# Altium PCB nfc.PcbDoc
Units mil, origin at the board's own origin, x right, y up, seen from the top; angles counter-clockwise.
Board outline 6000 x 4000 mil, 2 copper layers (Top Layer, Bottom Layer); 58 components, 64 nets, 237 pads, 16 vias.
Unrouted connection lines stored in the file: 139.
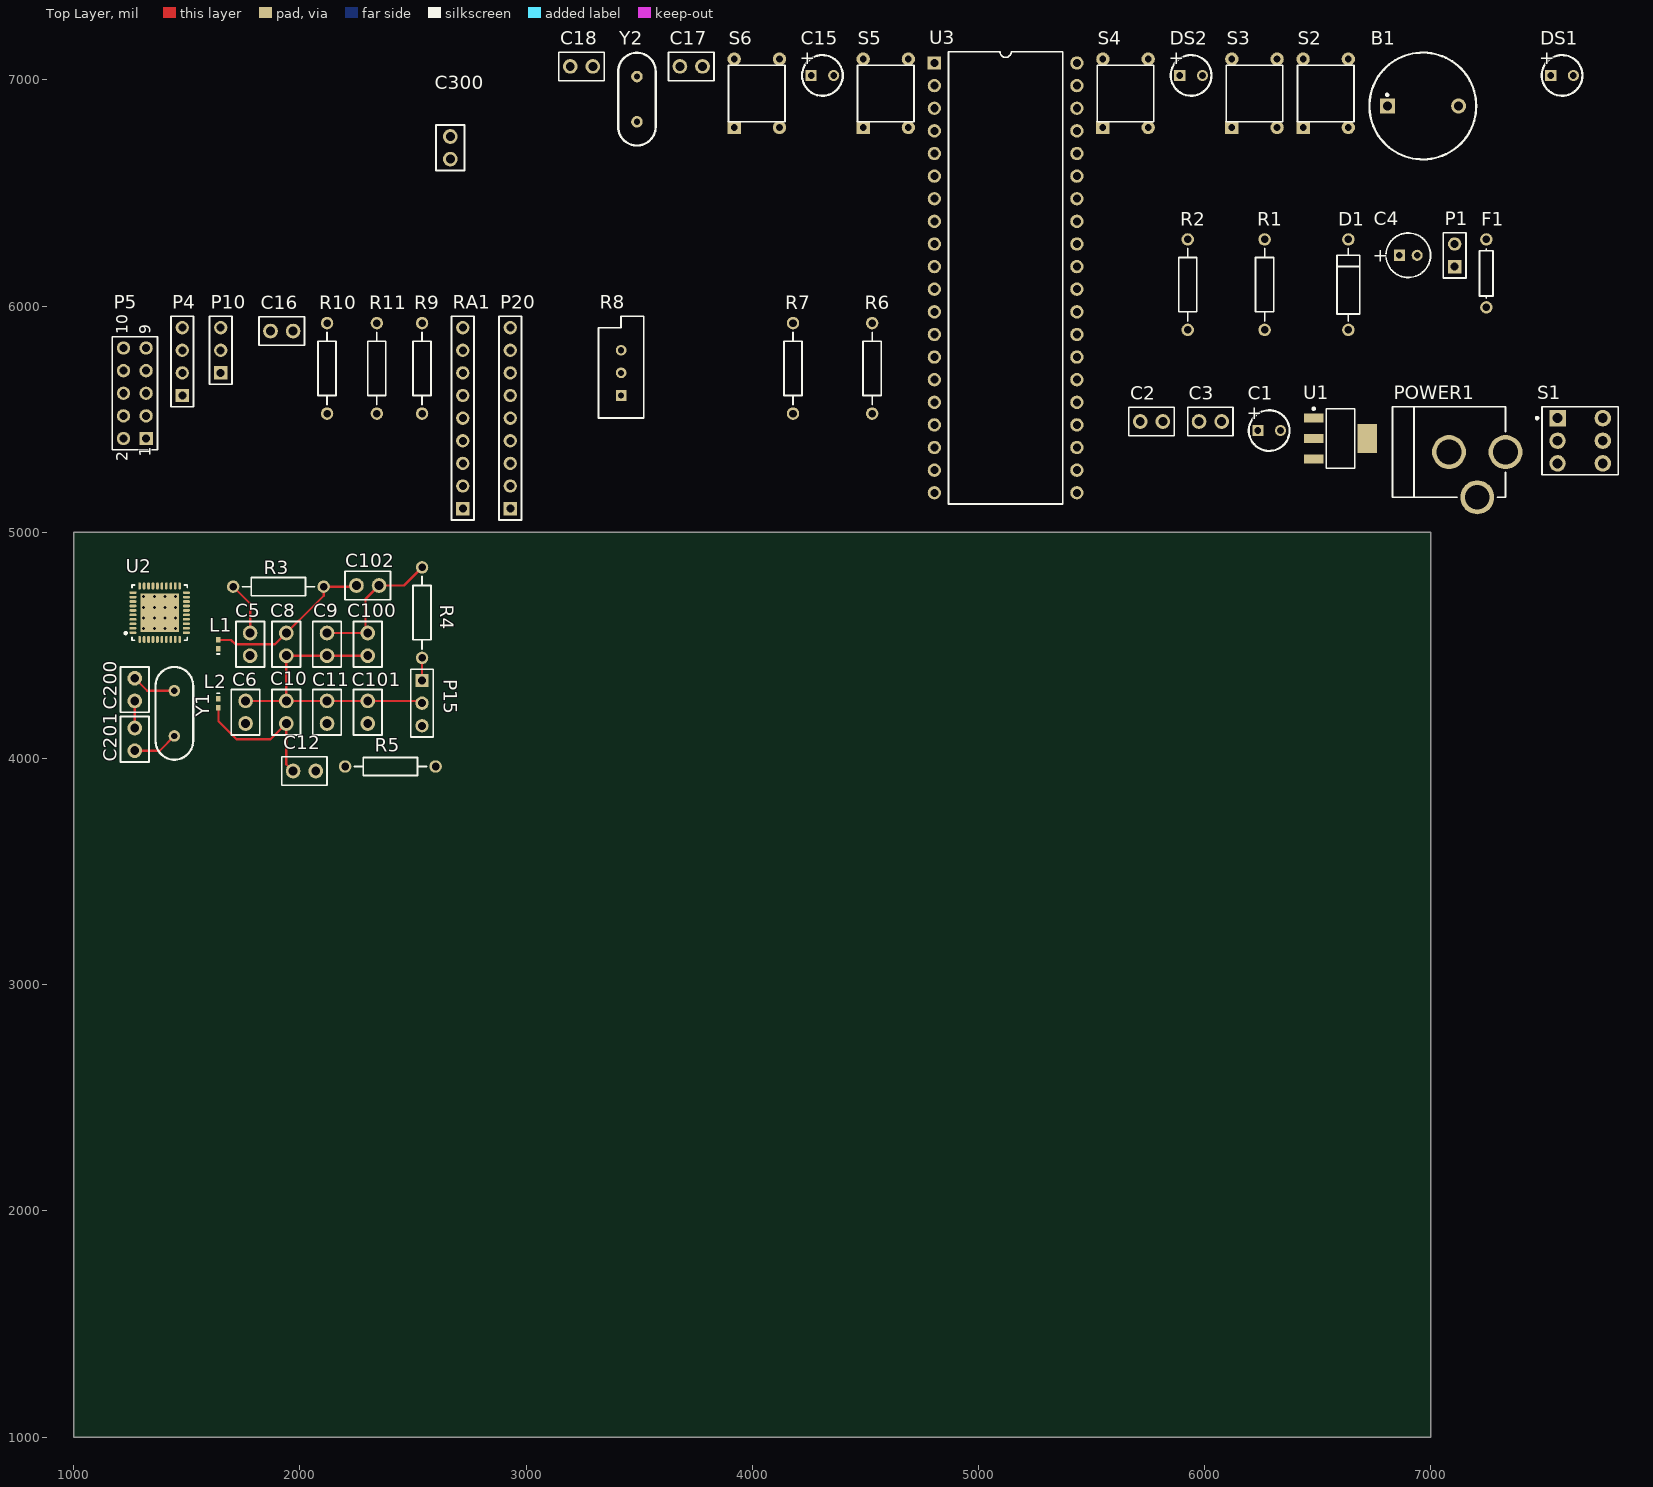
[diagram p0: Top Layer view]
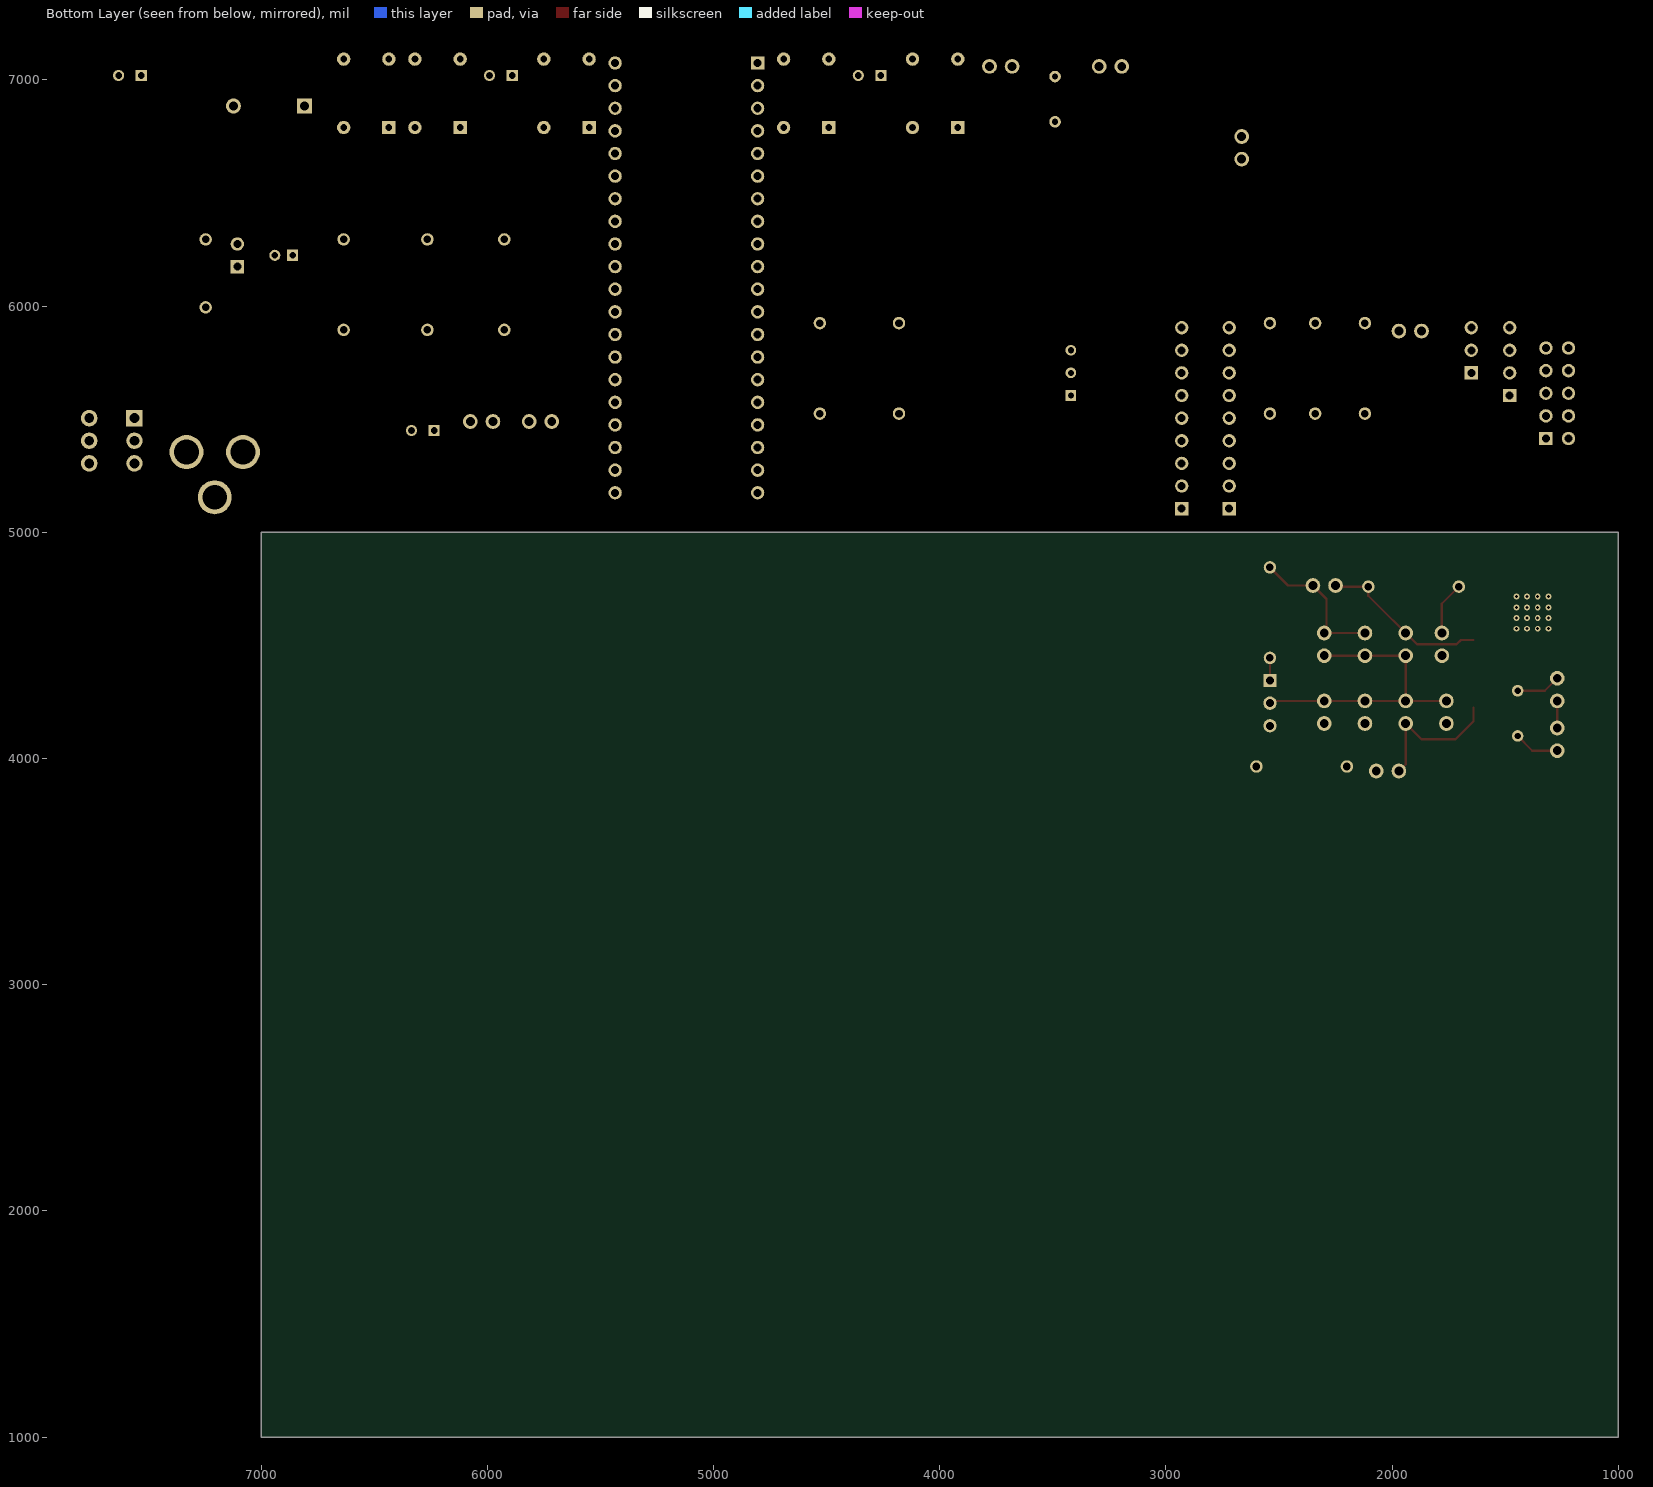
[diagram p1: Bottom Layer view, seen from below]

## Layer stack, top to bottom
Top Layer: signal copper 1.4
Dielectric: dielectric 12.6, FR-4, Dk 4.8
Bottom Layer: signal copper 1.4

## Board outline
1000,1000 7000,1000 7000,5000 1000,5000

## Design rules (kind name [scope] priority, off if disabled: settings)
Clearance [All] p1: gap=10
ComponentClearance [All] p1: gap=10 collisioncheckmode=3 verticalgap=10
PolygonConnect [All] p1: connectstyle=Relief reliefconductorwidth=10 reliefentries=4 polygonreliefangle="90 Angle"
RoutingVias [All] p1: holewidth=28 width=50 viastyle="Through Hole" minholewidth=28 minwidth=50 maxholewidth=28 maxwidth=50
SolderMaskExpansion [All] p1: expansion=4
TestPointUsage [All] p1: valid=0 allowmultiple=FALSE
Testpoint [All] p1: side=15 testpointundercomponent=TRUE minsize=40 maxsize=100 preferedsize=60 minholesize=0 maxholesize=40 preferedholesize=32 testpointgrid=1 style=1023 order=0123456789
Width [All] p1: maxlimit=10 minlimit=10 preferedwidth=10
18 further rules are at their usual default settings.

## Components (designator, comment, footprint, x,y, rotation, side; value= is the part's Value field where it differs from the comment)
B1 "BEEP" Buzzer 6965,6885 r0 top
C1 "CAP POL" CAP-LED 6285,5450 r0 top
C2 "Cap" CAP 5765,5490 r0 top
C3 "Cap" CAP 6025,5490 r0 top
C4 "Cap" B 6900,6225 r0 top
C5 "Cap" VP32-3.2 1780,4505 r90 top
C6 "Cap" VP32-3.2 1760,4205 r90 top
C8 "Cap" VP32-3.2 1940,4505 r90 top
C9 "Cap" VP32-3.2 2120,4505 r90 top
C10 "Cap" VP32-3.2 1940,4205 r90 top
C11 "Cap" VP32-3.2 2120,4205 r90 top
C12 "Cap" VP32-3.2 2020,3945 r0 top
C15 "CAP POL" CAP-LED 4310,7020 r0 top
C16 "Cap" VP32-3.2 1920,5890 r0 top
C17 "Cap" CAP 3730,7060 r0 top
C18 "Cap" CAP 3245,7060 r0 top
C100 "Cap" VP32-3.2 2300,4505 r90 top
C101 "Cap" VP32-3.2 2300,4205 r90 top
C102 "Cap" VP32-3.2 2300,4765 r0 top
C200 "Cap" VP32-3.2 1270,4305 r90 top
C201 "Cap" VP32-3.2 1270,4085 r270 top
C300 "Cap" VP32-3.2 2665,6700 r90 top
D1 "Diode 1N4001" DIODE-0.4 6635,6095 r90 top
DS1 "LED" CAP-LED 7580,7020 r0 top
DS2 "LED" CAP-LED 5940,7020 r0 top
F1 "FUSE1" AXIAL-0.3 7245,6145 r90 top
L1 "Inductor" 0402-A 1640,4505 r90 top
L2 "Inductor" 0402-A 1640,4245 r270 top
P1 "+3.3V" HDR1X2 7105,6175 r90 top
P4 "Header 4" HDR1X4 1480,5605 r90 top
P5 "Header 5X2" HDR2X5 1320,5415 r90 top
P10 "Header 3" HDR1X3 1650,5705 r90 top
P15 "Header 3" HDR1X3 2540,4345 r270 top
P20 "Header 9" HDR1X9 2930,5105 r90 top
POWER1 "POWER" Power 7330,5355 r0 top
R1 "RES" AXIAL-0.4 6265,6095 r90 top
R2 "Res2" AXIAL-0.4 5925,6095 r90 top
R3 "Res2" AXIAL-0.4 1905,4760 r180 top
R4 "Res2" AXIAL-0.4 2540,4645 r90 top
R5 "Res2" AXIAL-0.4 2400,3965 r180 top
R6 "RES" AXIAL-0.4 4530,5725 r90 top
R7 "RES" AXIAL-0.4 4180,5725 r90 top
R8 "RPot" VR5 3420,5705 r90 top
R9 "RES" AXIAL-0.4 2540,5725 r90 top
R10 "RES" AXIAL-0.4 2120,5725 r90 top
R11 "RES" AXIAL-0.4 2340,5725 r90 top
RA1 "Res Arry" HDR1X9 2720,5105 r90 top
S1 "SW-DPDT" SWITCH-6 7660,5405 r0 top
S2 "SW-PB" key 6435,6790 r90 top
S3 "SW-PB" key 6120,6790 r90 top
S4 "SW-PB" key 5550,6790 r90 top
S5 "SW-PB" key 4490,6790 r90 top
S6 "SW-PB" key 3920,6790 r90 top
U1 "REG1117-3.3" SOT230P700-4BN 6600,5415 r0 top
U2 "PN512-P40" QFN50P600X600-40V2N 1380,4645 r0 top
U3 "Atmel89S52" ATMEL89S52-DIP40 4805,7075 r0 top
Y1 "27.12MHz" XTAL 1445,4200 r90 top
Y2 "XTAL" XTAL 3490,6915 r90 top

## Footprints (in the part's own frame and the unit in brackets; to place one, negate y for a bottom-side part, rotate by r counter-clockwise, add the part's x,y. Pads: shape width x height; smd on the part's side, far side on the other; paste and mask are expansions set on the pad)
0402-A [mm] "Chip Inductor; Body 1 x 0.5 mm (LxW typ)"
  rect 0.6x0.5 smd: 1(-0.5,0) 2(0.5,0)
  silkscreen extent -1.1,-0.15 -1.1,0.15
ATMEL89S52-DIP40 [mm]
  rect 1.5x1.5 hole 0.9: 1(0,0)
  round 1.5 hole 0.9: 2(0,-2.54) 3(0,-5.08) 4(0,-7.62) 5(0,-10.16) 6(0,-12.7) 7(0,-15.24) 8(0,-17.78) 9(0,-20.32) 10(0,-22.86) 11(0,-25.4) 12(0,-27.94) 13(0,-30.48) 14(0,-33.02) 15(0,-35.56) 16(0,-38.1) 17(0,-40.64) 18(0,-43.18) 19(0,-45.72) 20(0,-48.26) 21(16,-48.26) 22(16,-45.72) 23(16,-43.18) 24(16,-40.64) 25(16,-38.1) 26(16,-35.56) 27(16,-33.02) 28(16,-30.48) 29(16,-27.94) 30(16,-25.4) 31(16,-22.86) 32(16,-20.32) 33(16,-17.78) 34(16,-15.24) 35(16,-12.7) 36(16,-10.16) 37(16,-7.62) 38(16,-5.08) 39(16,-2.54) 40(16,0)
  silkscreen extent 1.58,-49.53 14.42,1.27
AXIAL-0.3 [mm] "Resistor; 2 Leads"
  round 1.4 hole 0.85: 1(-3.81,0) 2(3.81,0)
  silkscreen extent -2.77,-0.76 2.77,0.76
AXIAL-0.4 [mm] "Resistor; 2 Leads"
  round 1.4 hole 0.85: 1(-5.08,0) 2(5.08,0)
  silkscreen extent -4.06,-1.02 4.06,1.02
B [mm] "Capacitor, Electrolytic, Radial; Body 5 x 6.8 mm (Dia.xH typ); Pin Spacing 2 mm (typ)"
  rect 1.25x1.25 hole 0.75: 1(-1,0)
  round 1.25 hole 0.75: 2(1,0)
  silkscreen extent -2.5,-2.5 2.5,2.5
Buzzer [mm] "Photosensitive Diode; 2 Leads"
  rect 1.7x1.7 hole 1: 1(-4,0)
  round 1.7 hole 1: 2(4,0)
  silkscreen extent -6.02,-6 5.98,6
CAP [mm] "Capacitor, Ceramic, Thru-Hole, Dipped Radial; Body 5.1 x 3.2 mm (WxT) Pin Spacing 2.54 mm (typ)"
  round 1.65 hole 1: 1(-1.27,0) 2(1.27,0)
  silkscreen extent -2.55,-1.6 2.55,1.6
CAP-LED [mm] "Capacitor, Electrolytic, Radial; Body 5 x 6.8 mm (Dia.xH typ); Pin Spacing 2 mm (typ)"
  rect 1.25x1.25 hole 0.75: 1(-1.27,0)
  round 1.25 hole 0.75: 2(1.27,0)
  silkscreen extent -2.28,-2.29 2.29,2.29
DIODE-0.4 [mm] "Tunnel Diode - Dependent Source Model; 2 Leads"
  round 1.4 hole 0.85: 1(-5.08,0) 2(5.08,0)
  silkscreen extent -4.06,-1.27 4.06,1.27
HDR1X2 [mm] "Connector; Header; 2 Position"
  rect 1.5x1.5 hole 0.9: 1(0,0)
  round 1.5 hole 0.9: 2(2.54,0)
  silkscreen extent -1.27,-1.27 3.81,1.27
HDR1X3 [mm] "Connector; Header; 3 Position"
  rect 1.5x1.5 hole 0.9: 1(0,0)
  round 1.5 hole 0.9: 2(2.54,0) 3(5.08,0)
  silkscreen extent -1.27,-1.27 6.35,1.27
HDR1X4 [mm] "Connector; Header; 4 Position"
  rect 1.5x1.5 hole 0.9: 1(0,0)
  round 1.5 hole 0.9: 2(2.54,0) 3(5.08,0) 4(7.62,0)
  silkscreen extent -1.27,-1.27 8.89,1.27
HDR1X9 [mm] "Connector; Header; 9 Position"
  rect 1.5x1.5 hole 0.9: 1(0,0)
  round 1.5 hole 0.9: 2(2.54,0) 3(5.08,0) 4(7.62,0) 5(10.16,0) 6(12.7,0) 7(15.24,0) 8(17.78,0) 9(20.32,0)
  silkscreen extent -1.27,-1.27 21.59,1.27
HDR2X5 [mm] "Connector; Header; 5x2 Position"
  rect 1.5x1.5 hole 0.9: 1(0,0)
  round 1.5 hole 0.9: 2(0,2.54) 3(2.54,0) 4(2.54,2.54) 5(5.08,0) 6(5.08,2.54) 7(7.62,0) 8(7.62,2.54) 9(10.16,0) 10(10.16,2.54)
  silkscreen extent -1.27,-1.27 11.43,3.81
key [mm]
  rect 1.5x1.5 hole 0.75: 1(0,0)
  round 1.5 hole 0.75: 1(7.68,0) 2(0,-5.08) 2(7.68,-5.08)
  silkscreen extent 0.64,-5.71 6.98,0.64
Power [mil]
  round 150 hole 110: 1(0,0) 2(-250,0) 2(-125,-200)
  silkscreen extent -500,-200 0,200
QFN50P600X600-40V2N [mm] "QFN, 40-Leads, Body 6x6mm, Pitch 0.5mm, IPC Medium Density"
  oval 0.8x0.3 smd: 1(-3,-2.25) 2(-3,-1.75) 3(-3,-1.25) 4(-3,-0.75) 5(-3,-0.25) 6(-3,0.25) 7(-3,0.75) 8(-3,1.25) 9(-3,1.75) 10(-3,2.25) 21(3,2.25) 22(3,1.75) 23(3,1.25) 24(3,0.75) 25(3,0.25) 26(3,-0.25) 27(3,-0.75) 28(3,-1.25) 29(3,-1.75) 30(3,-2.25)
  oval 0.3x0.8 smd: 11(-2.25,3) 12(-1.75,3) 13(-1.25,3) 14(-0.75,3) 15(-0.25,3) 16(0.25,3) 17(0.75,3) 18(1.25,3) 19(1.75,3) 20(2.25,3) 31(2.25,-3) 32(1.75,-3) 33(1.25,-3) 34(0.75,-3) 35(0.25,-3) 36(-0.25,-3) 37(-0.75,-3) 38(-1.25,-3) 39(-1.75,-3) 40(-2.25,-3)
  rect 4.3x4.3 smd: 41(0,0)
  silkscreen extent -3.93,-3.1 3.1,3.1, body extent -3.08,-3.08 3.08,3.08, height 1
SOT230P700-4BN [mm] "SOT223, 4-Leads, Body 6.5x3.5mm, Pitch 2.3mm, Lead Span 7mm, IPC Medium Density"
  rect 2.2x1 smd: 1(-3,2.3) 2(-3,0) 3(-3,-2.3)
  rect 2.2x3.3 smd: 4(3,0)
  silkscreen extent -3.12,-3.35 1.6,3.47, body extent -1.85,-3.35 1.85,3.35, height 1.8
SWITCH-6 [mm] "Double-Pole, Double-Throw Switch; 6 Leads"
  round 1.85 hole 1.1: 1(-2.54,0) 3(-2.54,-2.54) 4(2.54,0) 5(2.54,2.54) 6(2.54,-2.54)
  rect 1.85x1.85 hole 1.1: 2(-2.54,2.54)
  silkscreen extent -4.96,-3.81 4.28,3.81
VP32-3.2 [mm] "Capacitor, Ceramic, Thru-Hole, Dipped Radial; Body 5.1 x 3.2 mm (WxT) Pin Spacing 2.54 mm (typ)"
  round 1.65 hole 1: 1(-1.27,0) 2(1.27,0)
  silkscreen extent -2.55,-1.6 2.55,1.6
VR5 [mm] "Potentiometer; 3 Leads"
  rect 1.2x1.2 hole 0.7: 1(-2.54,0)
  round 1.2 hole 0.7: 2(0,0) 3(2.54,0)
  silkscreen extent -5.08,-2.54 6.35,2.54
XTAL [mm] "Crystal, Thru-Hole; 2 Leads; Body 3.1 x 8.2 mm (Dia.xH)"
  round 1.3 hole 0.7: 1(-2.54,0) 2(2.54,0)
  silkscreen extent -5.2,-2.11 5.2,2.11

## Part data
C1 C15: "Polarized Capacitor (Axial)"
C2 C3 C5 C6 C8 C9 C10 C11 C12 C16 C17 C18 C100 C101 C102 C200 C201 C300: "Capacitor"
C4: library part "Cap Pol1", "Polarized Capacitor (Radial)"
D1: "1 Amp General Purpose Rectifier"
P1: library part "Header 2", "Header, 2-Pin"
P4: "Header, 4-Pin"
P5: "Header, 5-Pin, Dual row"
P10 P15: "Header, 3-Pin"
P20: "Header, 9-Pin"
R1 R2 R3 R4 R5 R6 R7 R9 R10 R11: "Resistor"
R8: "Potentiometer"
S1: "Double-Pole, Double-Throw Switch"
U2: library part PN511-P40
Y1: library part XTAL, "Crystal Oscillator"
Y2: "Crystal Oscillator"

## Via types
v1: diameter 25.98, hole 12.99, Top Layer to Bottom Layer, tented top, 16 vias

## Nets (pads, with @x,y where several pads share a name; then routed paths per layer and width w, separated by ;. In a path a pad name is that pad's centre, name@x,y a point inside that pad or via, vN(x,y) a via of type N, cw(c..) or ccw(c..) an arc to the next point about the centre after c; other vN are vias at no path point)
BEEP: B1.2 U3.28
IRQ: P20.8 U2.26 U3.27
KEY1: S2.1 U3.14
KEY2: S3.1 U3.15
KEY3: S4.1 U3.16
LCD_A: C1.2 C2.2 C3.2 C4.2 C6.2 C8.1 C9.1 C10.2 C11.2 C16.2 C17.1 C18.1 C100.1 C101.2 C200.1 C201.1 C300.1 D1.1 P1.2 P4.4 P5.4 P5.6 P5.8 P5.10 P15.2 P20.9 R1.2 R8.2 R10.2 R11.1 S1.6 S2.2 S3.2 S4.2 U1.1 U2.1 U2.2 U2.3 U2.4 U2.7 U2.8 U2.17 U2.21 U2.40 U3.20 | length 1464.1
  Top Layer w10: C201.1 C200.1 ; C6.2 C11.2 C101.2 2530,4255 P15.2 ; C10.2 C8.1 C9.1 C100.1
LCD_K: C1.1 C2.1 C3.1 C4.1 C15.1 D1.2 DS1.1 F1.2 P5.2 R6.2 R7.2 R8.1 R9.1 RA1.1 S5.2 U1.3 U3.31 U3.40
LED: DS2.2 U3.13
MISO: P20.4 U2.38 U3.23
MOSI: P20.5 U2.37 U3.24
NCS: P20.3 U2.30 U3.22
NetB1_1: B1.1 R7.1
NetC5_1: C5.1 R2.1
NetC8_2: C8.2 C102.1 L1.2 R3.1 | length 749.3
  Top Layer w10: L1.2 1695.31,4524.69 1715,4505 1890,4505 2105,4720 R3.1 2245,4760 C102.1
NetC9_1: C9.2 C100.2 C102.2 R4.2 | length 633
  Top Layer w10: C9.2 C100.2 ; C100.2@2290,4560 2290,4705 C102.2 2460,4765 R4.2
NetC10_1: C10.1 C12.1 L2.2 | length 644.9
  Top Layer w10: L2.2 1640,4165 1720,4085 1870,4085 C10.1 1940,3975 C12.1
NetC11_2: C11.1 C12.2 C101.1 R5.2
NetC15_2: C15.2 P10.1 R11.2 S5.1
NetC17_2: C17.2 U3.18 Y2.2
NetC18_2: C18.2 U3.19 Y2.1
NetC200_2: C200.2 U2.25 Y1.2 | length 197.8
  Top Layer w10: C200.2 1325,4300 Y1.2
NetC201_2: C201.2 U2.24 Y1.1 | length 201.9
  Top Layer w10: C201.2 1380,4035 Y1.1
NetDS1_2: DS1.2 R1.1
NetDS2_1: DS2.1 R6.1
NetF1_1: F1.1 S1.3
NetHeader1_3: R8.3
NetL1_1: L1.1 U2.14
NetL2_1: L2.1 U2.16
NetP15_1: P15.1 R4.1 | length 100
  Top Layer w10: P15.1 R4.1
NetP15_3: P15.3 R5.1
NetPOWER1_1: POWER1.1 S1.1
NetPOWER1_2: POWER1.2 S1.4
NetR10_1: R10.1 S6.1
NRSTPD: P20.7 U2.9 U3.26
NSS: P20.2 U2.29 U3.21
P00: RA1.2 U3.39
P01: RA1.3 U3.38
P02: RA1.4 U3.37
P03: RA1.5 U3.36
P04: RA1.6 U3.35
P05: RA1.7 U3.34
P06: RA1.8 U3.33
P07: RA1.9 U3.32
P10: U3.1
P11: U3.2
P12: U3.3
P13: U3.4
P14: U3.5
P15: P5.1 U3.6
P16: P5.9 U3.7
P17: P5.7 U3.8
P32: C16.1 S6.2 U3.12
P37: U3.17
RST: P10.2 U3.9
RST2: P5.5 P10.3 R9.2
RX: C6.1 R2.2 U2.20
RXD: U3.10
SCK: P20.6 U2.36 U3.25
SIGIN: C5.2 P4.2 R3.2 U2.10 | length 236.1
  Top Layer w10: R3.2 1780,4685 C5.2
SIGOUT: P4.3 U2.11
SVDD: P4.1 U1.2 U1.4 U2.5 U2.6 U2.12 U2.15 U2.18 U2.27 U2.28 U2.39
TXD: U3.11
VCC: C300.2
VMID: P1.1 P20.1 U2.19
pads on no net: P5.3 S1.2 S1.5 U2.13 U2.22 U2.23 U2.31 U2.32 U2.33 U2.34 U2.35 U2.41 U3.29 U3.30
copper on no net:
  other v1: 1309.13,4574.13 1356.38,4574.13 1403.62,4574.13 1450.87,4574.13 1309.13,4621.38 1356.38,4621.38 1403.62,4621.38 1450.87,4621.38 1309.13,4668.62 1356.38,4668.62 1403.62,4668.62 1450.87,4668.62 1309.13,4715.87 1356.38,4715.87 1403.62,4715.87 1450.87,4715.87

## Text inside footprints (layer, text, board x,y; h text height)
C1: Top Overlay "+" at 6185,5500 h59.06
C4: Top Overlay "+" at 6743.5,6195.47 h59.06
C15: Top Overlay "+" at 4210,7070 h59.06
DS1: Top Overlay "+" at 7480,7070 h59.06
DS2: Top Overlay "+" at 5840,7070 h59.06
P5: Top Overlay "2" at 1240,5315 h50 r90; Top Overlay "1" at 1340,5335 h50 r90; Top Overlay "9" at 1340,5875 h50 r90; Top Overlay "10" at 1240,5875 h50 r90